# Altium PCB Gyroscope.PcbDoc
Units mil, origin at the board's own origin, x right, y up, seen from the top; angles counter-clockwise.
Board outline 800 x 1100 mil, 2 copper layers (Top Layer, Bottom Layer); 12 components, 16 nets, 66 pads, 4 vias.
Unrouted connection lines stored in the file: 14.
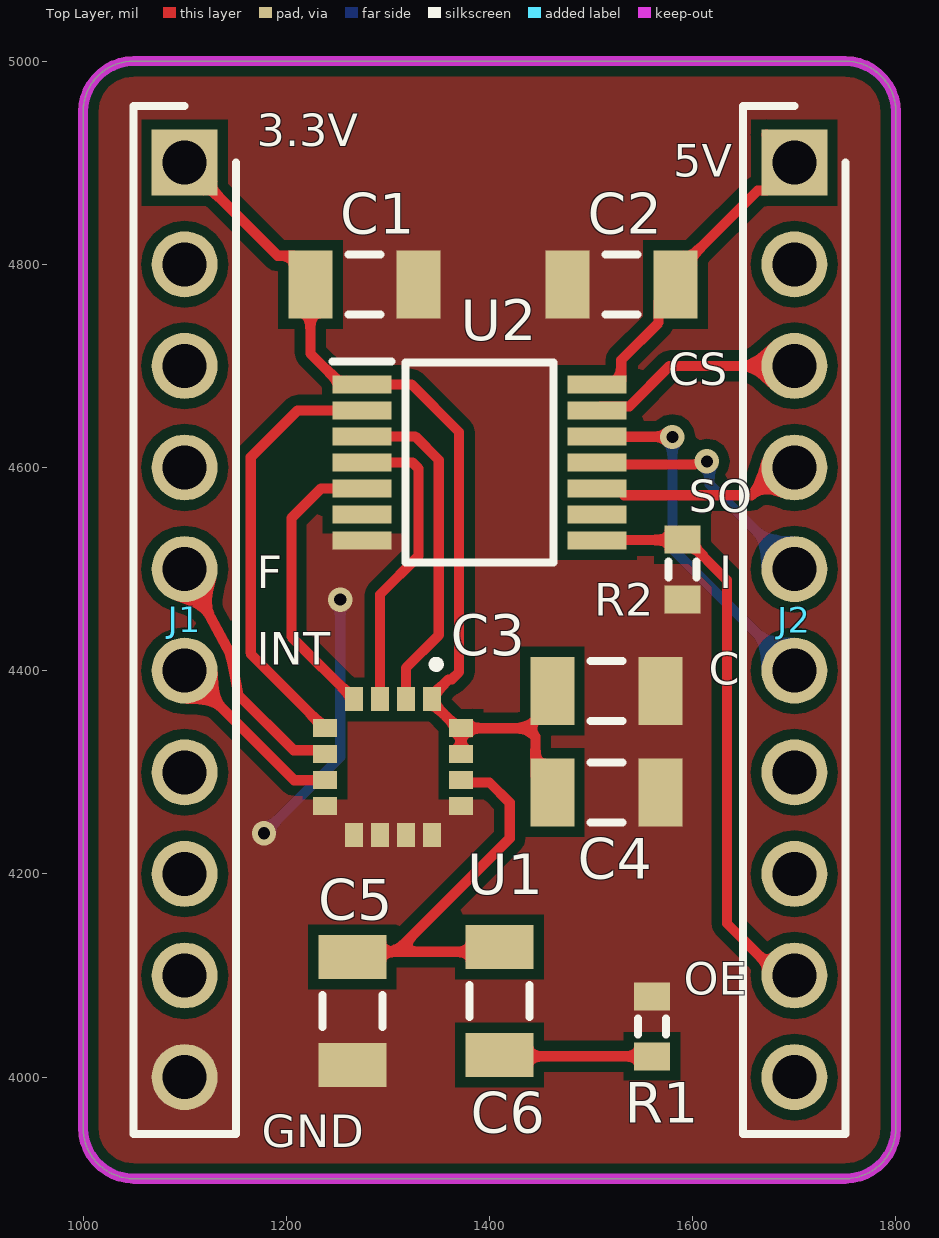
[diagram p0: Top Layer view]
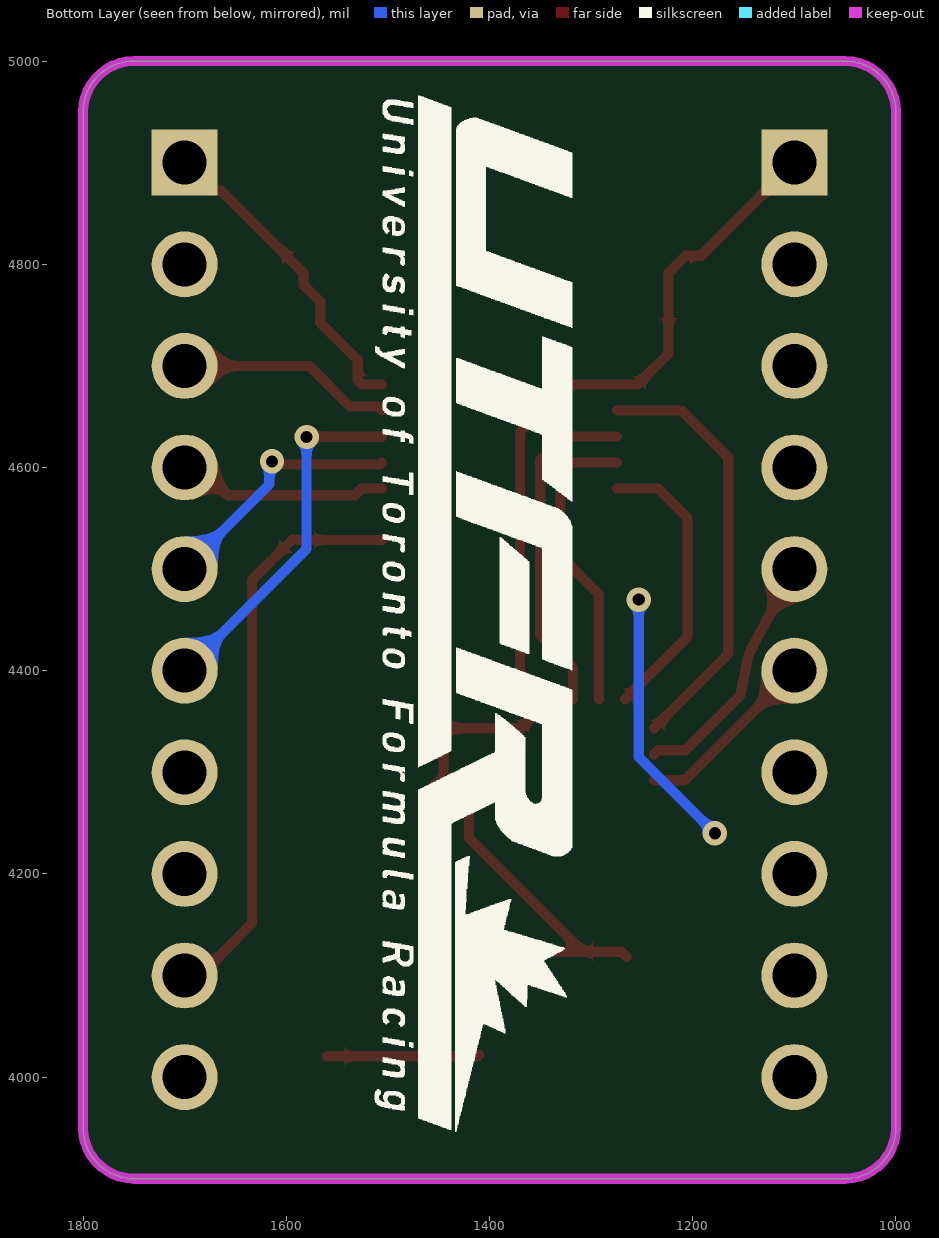
[diagram p1: Bottom Layer view, seen from below]

## Layer stack, top to bottom
Top Solder: solder mask 0.4, Solder Resist, Dk 3.5
Top Layer: signal copper 1.4
Dielectric 1: dielectric 12.6, FR-4, Dk 4.8
Bottom Layer: signal copper 1.4
Bottom Solder: solder mask 0.4, Solder Resist, Dk 3.5

## Board outline
1050,3900 cw(c1050,3950) 1000,3950 1000,4950 cw(c1050,4950) 1050,5000 1750,5000 cw(c1750,4950) 1800,4950 1800,3950 cw(c1750,3950) 1750,3900

## Design rules (kind name [scope] priority, off if disabled: settings)
Clearance [All] p1: gap=10 ignorepadtopadclearanceinfootprint=FALSE except(0: Arc-Hole Track-Hole SMDPad-Hole THPad-Hole Via-Hole Fill-Hole Poly-Hole Region-Hole Text-Hole; 5: Arc-SMDPad Track-SMDPad SMDPad-SMDPad)
PolygonConnect PolygonConnect_2 [All vs IsNamedPolygon('GND_L01_P001')] p1: connectstyle=Direct reliefconductorwidth=10 reliefentries=4 polygonreliefangle="90 Angle" airgapwidth=10
PolygonConnect PolygonConnect_1 [All vs IsNamedPolygon('NONET_L01_P000')] p2: connectstyle=Direct reliefconductorwidth=10 reliefentries=4 polygonreliefangle="90 Angle" airgapwidth=10
PolygonConnect [All] p3: connectstyle=Relief reliefconductorwidth=10 reliefentries=4 polygonreliefangle="90 Angle" airgapwidth=10
RoutingVias [All] p1: holewidth=28 width=50 viastyle="Through Hole" minholewidth=28 minwidth=50 maxholewidth=28 maxwidth=50
SolderMaskExpansion [All] p1: expansion=4 istentingtop=FALSE
Width [All] p1: maxlimit=10 minlimit=10 preferedwidth=10
30 further rules are at their usual default settings.

## Components (designator, comment, footprint, x,y, rotation, side; value= is the part's Value field where it differs from the comment)
C1 "0.1uF" C1206 1276.85,4780 r0 top value=100nF
C2 "0.1uF" C1206 1530,4780 r180 top value=100nF
C3 "0.1uF" C1206 1515,4380 r0 top value=100nF
C4 "10uF" C1206 1515,4280 r0 top value=100nF
C5 "10nF 10%" C1206 1265,4065 r270 top value=100nF
C6 "470nF 10%" C1206 1410,4075 r270 top value=100nF
J1 "68000-210HLF" HDRV10W63P0X254_1X10_2540X241X858P 1100,4900 r270 top
J2 "68000-210HLF" HDRV10W63P0X254_1X10_2540X241X858P 1700,4900 r270 top
R1 "10k 10%" J1-0603 1560,4050 r90 top value=220
R2 "10K" J1-0603 1590,4499.53 r270 top
U1 "A3G4250DTR" LGA-16L(4X4X1.1MM) 1305,4305 r270 top
U2 "TXS0104EPWR" SOP65P640X120-14N 1390,4605 r0 top

## Footprints (in the part's own frame and the unit in brackets; to place one, negate y for a bottom-side part, rotate by r counter-clockwise, add the part's x,y. Pads: shape width x height; smd on the part's side, far side on the other; paste and mask are expansions set on the pad)
C1206 [mm] "Chip Capacitor, Body 3.2x1.6mm, IPC High Density"
  rect 1.1x1.7 smd: 1(-1.35,0) 2(1.35,0)
  silkscreen extent -0.4,-0.75 0.4,0.75, body extent -1.7,-0.9 1.7,0.9, height 1.3
HDRV10W63P0X254_1X10_2540X241X858P [mm]
  rect 1.65x1.65 hole 1.1: 1(0,0)
  round 1.65 hole 1.1: 2(2.54,0) 3(5.08,0) 4(7.62,0) 5(10.16,0) 6(12.7,0) 7(15.24,0) 8(17.78,0) 9(20.32,0) 10(22.86,0)
  silkscreen extent -1.42,-1.28 24.28,1.28, body extent -1.27,-1.2 24.13,1.2, height 8.58
J1-0603 [mm] "Chip Resistor, Body 1.6x0.8mm, IPC High Density"
  rect 0.7x0.9 smd: 1(-0.75,0) 2(0.75,0)
  silkscreen extent -0.2,-0.35 0.2,0.35, body extent -0.85,-0.48 0.85,0.48, height 0.9
LGA-16L(4X4X1.1MM) [mm]
  rect 0.6x0.45 smd: 1(-1.7,0.975) 2(-1.7,0.325) 3(-1.7,-0.325) 4(-1.7,-0.975) 9(1.7,-0.975) 10(1.7,-0.325) 11(1.7,0.325) 12(1.7,0.975)
  rect 0.45x0.6 smd: 5(-0.975,-1.7) 6(-0.325,-1.7) 7(0.325,-1.7) 8(0.975,-1.7) 13(0.975,1.7) 14(0.325,1.7) 15(-0.325,1.7) 16(-0.975,1.7)
  silkscreen extent -2.66,0.99 -2.48,1.17
SOP65P640X120-14N [mm]
  rect 1.475x0.45 smd: 1(-2.938,1.95) 2(-2.938,1.3) 3(-2.938,0.65) 4(-2.938,0) 5(-2.938,-0.65) 6(-2.938,-1.3) 7(-2.938,-1.95) 8(2.938,-1.95) 9(2.938,-1.3) 10(2.938,-0.65) 11(2.938,0) 12(2.938,0.65) 13(2.938,1.3) 14(2.938,1.95)
  silkscreen extent -3.67,-2.5 1.85,2.52, body extent -3.2,-2.5 3.2,2.5, height 1.13

## Part data
C1 C2 C3 C4 C5 C6: library part "Cap Semi", "Capacitor (Semiconductor SIM Model)", LatestRevisionDate=29-May-2009, LatestRevisionNote="IPC-7351 Footprint Added.", PackageDescription="Chip Capacitor", PackageReference=C1206, Published=8-Jun-2000, Publisher="Altium Limited"
J1 J2: "Connector", Manufacturer_Name=Amphenol, Mouser Part Number=649-68000-210HLF, Arrow Part Number=68000-210HLF, Arrow Price/Stock=https://www.arrow.com/en/products/68000-210hlf/amphenol-fci, Datasheet Link=https://cdn.amphenol-icc.com/media/wysiwyg/files/drawing/68000.pdf, Height=8.58mm, Manufacturer_Part_Number=68000-210HLF, Mouser Price/Stock=https://www.mouser.co.uk/ProductDetail/Amphenol-FCI/68000-210HLF?qs=QKvFUfBIyQINb7f%2F4SDc2A%3D%3D
R1 R2: library part Res3, "Resistor", LatestRevisionDate=29-May-2009, LatestRevisionNote="IPC-7351 Footprint Added.", PackageDescription="Chip Resistor", PackageReference=J1-0603, Published=8-Jun-2000, Publisher="Altium Limited"
U1: "Integrated Circuit", Manufacturer_Name=STMicroelectronics, Mouser Part Number=511-A3G4250DTR, Arrow Part Number=A3G4250DTR, Arrow Price/Stock=https://www.arrow.com/en/products/a3g4250dtr/stmicroelectronics, Datasheet Link=https://www.st.com/resource/en/datasheet/a3g4250d.pdf, Manufacturer_Part_Number=A3G4250DTR, Mouser Price/Stock=https://www.mouser.co.uk/ProductDetail/STMicroelectronics/A3G4250DTR/?qs=Ld7sMN6XJzCU8%252BkHd1RE7g%3D%3D
U2: "Integrated Circuit", Manufacturer_Name="Texas Instruments", Mouser Part Number=595-TXS0104EPWR, Arrow Part Number=TXS0104EPWR, Arrow Price/Stock=https://www.arrow.com/en/products/txs0104epwr/texas-instruments?region=nac, Datasheet Link=http://www.ti.com/lit/ds/symlink/txs0104e.pdf, Height=1.2mm, Manufacturer_Part_Number=TXS0104EPWR, Mouser Price/Stock=https://www.mouser.co.uk/ProductDetail/Texas-Instruments/TXS0104EPWR?qs=7kv20MEVUlglsv2MH6ZndA%3D%3D

## Via types
v1: diameter 24, hole 12, Top Layer to Bottom Layer, 4 vias

## Nets (pads, with @x,y where several pads share a name; then routed paths per layer and width w, separated by ;. In a path a pad name is that pad's centre, name@x,y a point inside that pad or via, vN(x,y) a via of type N, cw(c..) or ccw(c..) an arc to the next point about the centre after c; other vN are vias at no path point)
Arduino_5V: C2.1 J2.1 U2.14 | length 354.5
  Top Layer w10: U2.14 1525.85,4681.77 1529.7,4685.63 1529.7,4705.81 1566.5,4742.6 1566.5,4763.35 C2.1 1583.15,4791.81 1663.86,4872.52 1672.52,4872.52 J2.1 J2.1@1672.52,4927.48
CS_G: U1.5 U2.2 | length 425.2
  Top Layer w10: U1.5 1234.21,4347.24 1165.59,4415.87 ccw(c1100,4400) 1165,4418.13 1165,4610 1211.18,4656.18 U2.2
CS_GYRO: J2.3 U2.13 | length 212.5
  Top Layer w10: U2.13 1509.53,4660.04 1537.54,4660.04 1577.5,4700 J2.3
FIFO: J1.5 U1.6 | length 245.3
  Top Layer w10: J1.5 1141.75,4422.61 cw(c1100,4400) 1146.65,4408.84 1152.85,4376.11 1207.31,4321.65 1234.21,4321.65 U1.6
GND: C1.2 C2.2 C3.2 C4.2 C5.2 J1.10 R1.2 R2.2 U1.8 U1.9 U1.10 U1.11 U1.12 U1.13 U2.7 | length 261.1
  Bottom Layer w10: v1(1178.11,4240) 1253.11,4315 v1(1253.11,4470)
INT: J1.6 U1.7 | length 182.7
  Top Layer w10: J1.6 1207.8,4292.2 U1.7
MISO_G: U1.4 U2.5 | length 285.1
  Top Layer w10: U1.4 1205,4433.54 1205,4550 1234.41,4579.41 U2.5
MISO_Mega: J2.4 U2.10 | length 208.4
  Top Layer w10: U2.10 1525.85,4579.41 1532.58,4572.68 1657.81,4572.68 1685.13,4600 J2.4
MOSI_G: U1.3 U2.4 | length 301
  Top Layer w10: U2.4 1324.14,4605 1330,4599.14 1330,4512.79 1292.2,4474.99 U1.3
MOSI_Mega: J2.5 U2.11 | length 252
  Top Layer w10: U2.11 1507.67,4603 1601.89,4603 1602.19,4603.3 1611.34,4603.3 v1(1614.02,4605.98)
  Bottom Layer w10: v1(1614.02,4605.98) 1616.7,4603.3 1616.7,4583.3 J2.5
NetC5_1: C5.1 C6.1 U1.14 | length 395.7
  Top Layer w10: C5.1 1270.18,4123.33 1308.33,4123.33 ; U1.14 1374.13,4290 1400,4290 1420,4270 1420,4235 1308.33,4123.33 ; C6.1@1408.33,4123.33 1308.33,4123.33
NetC6_2: C6.2 R1.1 | length 150.6
  Top Layer w10: C6.2 1411.38,4020.47 R1.1
OE: J2.9 R2.1 U2.8 | length 570.4
  Top Layer w10: U2.8 1506.08,4528.64 1589.59,4528.64 R2.1 1593.94,4529.06 1633.86,4489.13 1633.86,4151.14 1665,4120 1665.13,4120 1685.13,4100 J2.9
SCK_G: U1.2 U2.3 | length 334.1
  Top Layer w10: U2.3 1326.84,4630.59 1350,4607.43 1350,4435 1317.8,4402.8 U1.2
SCK_Mega: J2.6 U2.12 | length 354.3
  Top Layer w10: U2.12 1505.96,4630.3 1579.7,4630.3 v1(1580,4630)
  Bottom Layer w10: v1(1580,4630) 1580,4520 J2.6
VCC_3.3: C1.1 C3.1 C4.1 J1.1 U1.1 U1.15 U1.16 U2.1 | length 952.6
  Top Layer w10: J1.1 1191.54,4808.46 1207.05,4808.46 1223.7,4791.81 C1.1 1223.7,4712.22 1254.15,4681.77 U2.1 1323.23,4681.77 1370,4635 1370,4398.54 1362.93,4391.47 1359.98,4391.47 1343.39,4374.88 U1.1 ; U1.1@1343.39,4368.98 1368.98,4343.39 U1.16 ; U1.15 U1.16 ; C4.1 1445.2,4296.65 1445.2,4335.24 1437.05,4343.39 ; C3.1 1461.85,4368.19 1437.05,4343.39 ; U1.16 1437.05,4343.39
pads on no net: J1.2 J1.3 J1.4 J1.7 J1.8 J1.9 J2.2 J2.7 J2.8 J2.10 U2.6 U2.9

## Polygon pours and split planes (outlines as drawn)
GND on Top Layer "GND_L01_P001" (solid, remove dead copper, pour order 1): 1000,3900 1000,5000 1800,5000 1800,3900

## Keep-outs
Keep-Out Layer:
  the board outline again, w10

## Silkscreen, mask and mechanical layers (free items; w line width, h text height)
Top Overlay:
  text "3.3V" at 1171,4916 h32
  text "5V" at 1581,4886 h32
  text "CS" at 1576,4681 h32
  text "SO" at 1596,4556 h32
  text "F" at 1171,4481 h32
  text "I" at 1626,4481 h32
  text "INT" at 1171,4406 h32
  text "C" at 1616,4386 h32
  text "OE" at 1591,4081 h32
  text "GND" at 1176,3931 h32
Bottom Overlay:
  drawing of 42 lines, arcs and shapes, not listed